# EAGLE board c64saver_1.1 (EAGLE 6.0)
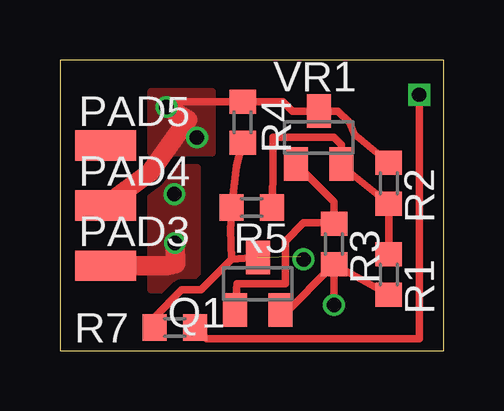
[diagram p0: board, top side]
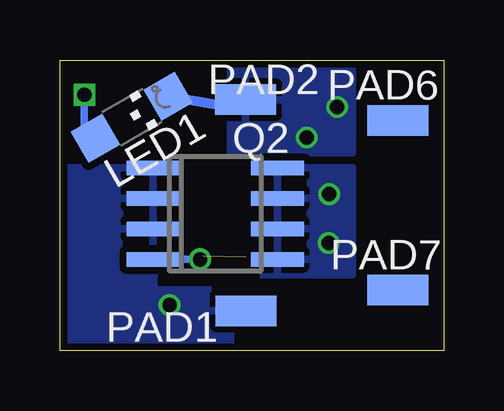
[diagram p1: board, bottom side, seen from below]

Size 16 x 12.12 mm. Coordinates in mm from the lower left corner, seen from the top.
Outline: 0,0 16,0 16,12.12 0,12.12 0,0
Copper layers (1*16): Top 0.035mm / dielectric 1.5mm / Bottom 0.035mm
Design rules: minimum track width 5mil, minimum drill 12mil, track to track 5mil, track to pad 5mil, pad to pad 5mil, via to via 5mil, smd to smd 0mil, copper to edge 10mil, drill to drill 10mil, minimum pad ring 10mil, minimum via ring 6mil, stop-mask expansion 2mil, vias tented up to drill 25mil, thermal gap 10mil

## Footprints (pad centres in the part's own frame; a part is rotated, then mirrored left to right if it is on the bottom)
CHIPLED_1206 = smd 1.5 x 1.5: A 0,-1.75; C 0,1.75
SMD1,27-2,54 = smd 1.27 x 2.54: 1 0,0
SOT23 = smd 1 x 1.4: 1 -0.95,-1.1; 2 0.95,-1.1; 3 0,1.1
SO-08 = smd 0.6 x 2.2: 1 -1.905,-2.6; 2 -0.635,-2.6; 3 0.635,-2.6; 4 1.905,-2.6; 5 1.905,2.6; 6 0.635,2.6; 7 -0.635,2.6; 8 -1.905,2.6
R0603 = smd 1 x 1.1: 1 -0.85,0; 2 0.85,0

## Placement (x,y rotation side)
LED1  RED_SIDEView  [CHIPLED_1206]  13,9.73 300 bottom
PAD1  [SMD1,27-2,54]  8.24,1.66 270 bottom
PAD2  [SMD1,27-2,54]  8.26,10.46 270 bottom
PAD3  [SMD1,27-2,54]  1.91,3.54 270 top
PAD4  [SMD1,27-2,54]  1.91,6.06 270 top
PAD5  [SMD1,27-2,54]  1.91,8.55 270 top
PAD6  [SMD1,27-2,54]  1.91,9.59 270 bottom
PAD7  [SMD1,27-2,54]  1.91,2.54 270 bottom
Q1  BSS84  [SOT23]  8.26,2.79 0 top
Q2  IRF9332PBF  [SO-08]  9.53,5.71 270 bottom
R1  3k9  [R0603]  13.72,3.17 270 top
R2  3k3  [R0603]  13.72,6.99 270 top
R3  3k3  [R0603]  11.43,4.45 270 top
R4  3k9  [R0603]  7.62,9.53 270 top
R5  330k  [R0603]  8,5.97 0 top
R7  1k  [R0603]  4.8,0.97 180 top
VR1  TL431  [SOT23]  10.79,8.89 0 top

## Library data of the parts
LED1 = led
PAD1-PAD7 = wirepad
Q1 = transistor-small-signal
Q2 = transistor-power
R1-R5 R7 = rcl
VR1 = v-reg

## Nets
5VSAFE: PAD3.1 Q2.5 Q2.6 Q2.7 Q2.8
+5V: PAD1.1 Q1.2 Q2.1 Q2.2 Q2.3 R1.2 R3.2
GND: LED1.C PAD2.1 PAD4.1 R2.1 R4.1 VR1.3
N$1: LED1.A R7.1
N$2: R1.1 R2.2 R5.2 VR1.2
N$5: Q1.1 R3.1 VR1.1
N$7: Q1.3 Q2.4 R4.2 R5.1 R7.2

## Tracks (layer width: path | path; a pad name or v marks a point on that pad's centre or on a via)
5VSAFE  (via drill 0.6)
  Top 0.813: PAD3.1 4.45,3.54 4.82,3.63 v4.79,4.5
  other vias: 4.77,6.52
  pour Bottom (isolate 0.305): 3.81,7.62 7.62,7.62 7.62,3.17 3.81,3.17
  pour Top (isolate 0.305): 3.81,7.62 3.81,2.54 5.71,2.54 5.71,7.62
+5V  (via drill 0.6)
  Top 0.305: R1.2 R3.2 | Q1.2 9.28,1.44 R3.2 | R3.2 v11.43,1.91
  pour Bottom (isolate 0.305): 12.06,7.62 12.06,2.54 8.89,2.54 8.89,0 15.88,0 15.88,7.62
GND  (via drill 0.6)
  Top 0.305: 13.97,7.62 R2.1 12.28,9.02 12.06,9.53 11.6,9.99 VR1.3 9.7,9.99 9.31,10.38 R4.1 4.66,10.38 v4.45,10.16
  Top 0.813: PAD4.1 3.76,7.43 5.32,9.63 v4.45,10.16
  Bottom 0.406: LED1.C 8.89,10.16 8.89,10.38
  other vias: 5.71,8.89
  pour Bottom (isolate 0.305): 3.81,8.26 8.89,8.26 8.89,12.06 3.81,12.06
  pour Top (isolate 0.305): 3.81,8.26 3.81,10.79 6.35,10.79 6.35,8.26
N$1  (via drill 0.6)
  Top 0.305: R7.1 6.11,0.51 14.99,0.51 v14.99,10.67
  Bottom 0.305: v14.99,10.67 14.99,9.4 14.48,8.89 LED1.A
N$2
  Top 0.305: R1.1 R2.2 12.13,7.41 VR1.2 11.74,8.57 11.43,8.89 8.89,8.89 8.89,7.2 R5.2
N$5
  Top 0.305: 11.43,5.33 R3.1 11.43,5.08 | 11.43,5.33 11.43,6.21 VR1.1 | Q1.1 7.39,2.79 9.4,2.79 9.4,4.57 10.16,5.33 11.43,5.33
N$7  (via drill 0.6)  (1 unrouted)
  Top 0.305: v10.16,3.81 10.03,3.94 | 7.16,3.81 7.11,5.08 7.15,5.55 R5.1 7.37,7.71 R4.2 | Q1.3 7.16,3.81 | R7.2 3.95,1.41 5.08,2.54 5.88,2.54 7.16,3.81
  Bottom 0.305: Q2.4 v10.16,3.81

## Text on the board
bStop: - | +